# Altium PCB XLIN1.7-2048SQ TE0_MB.PcbDoc
Units mm, origin at the board's own origin, x right, y up, seen from the top; angles counter-clockwise.
Board outline 150 x 150 mm, 2 copper layers (Top Layer, Bottom Layer); 42 components, 60 nets, 288 pads, 0 vias.
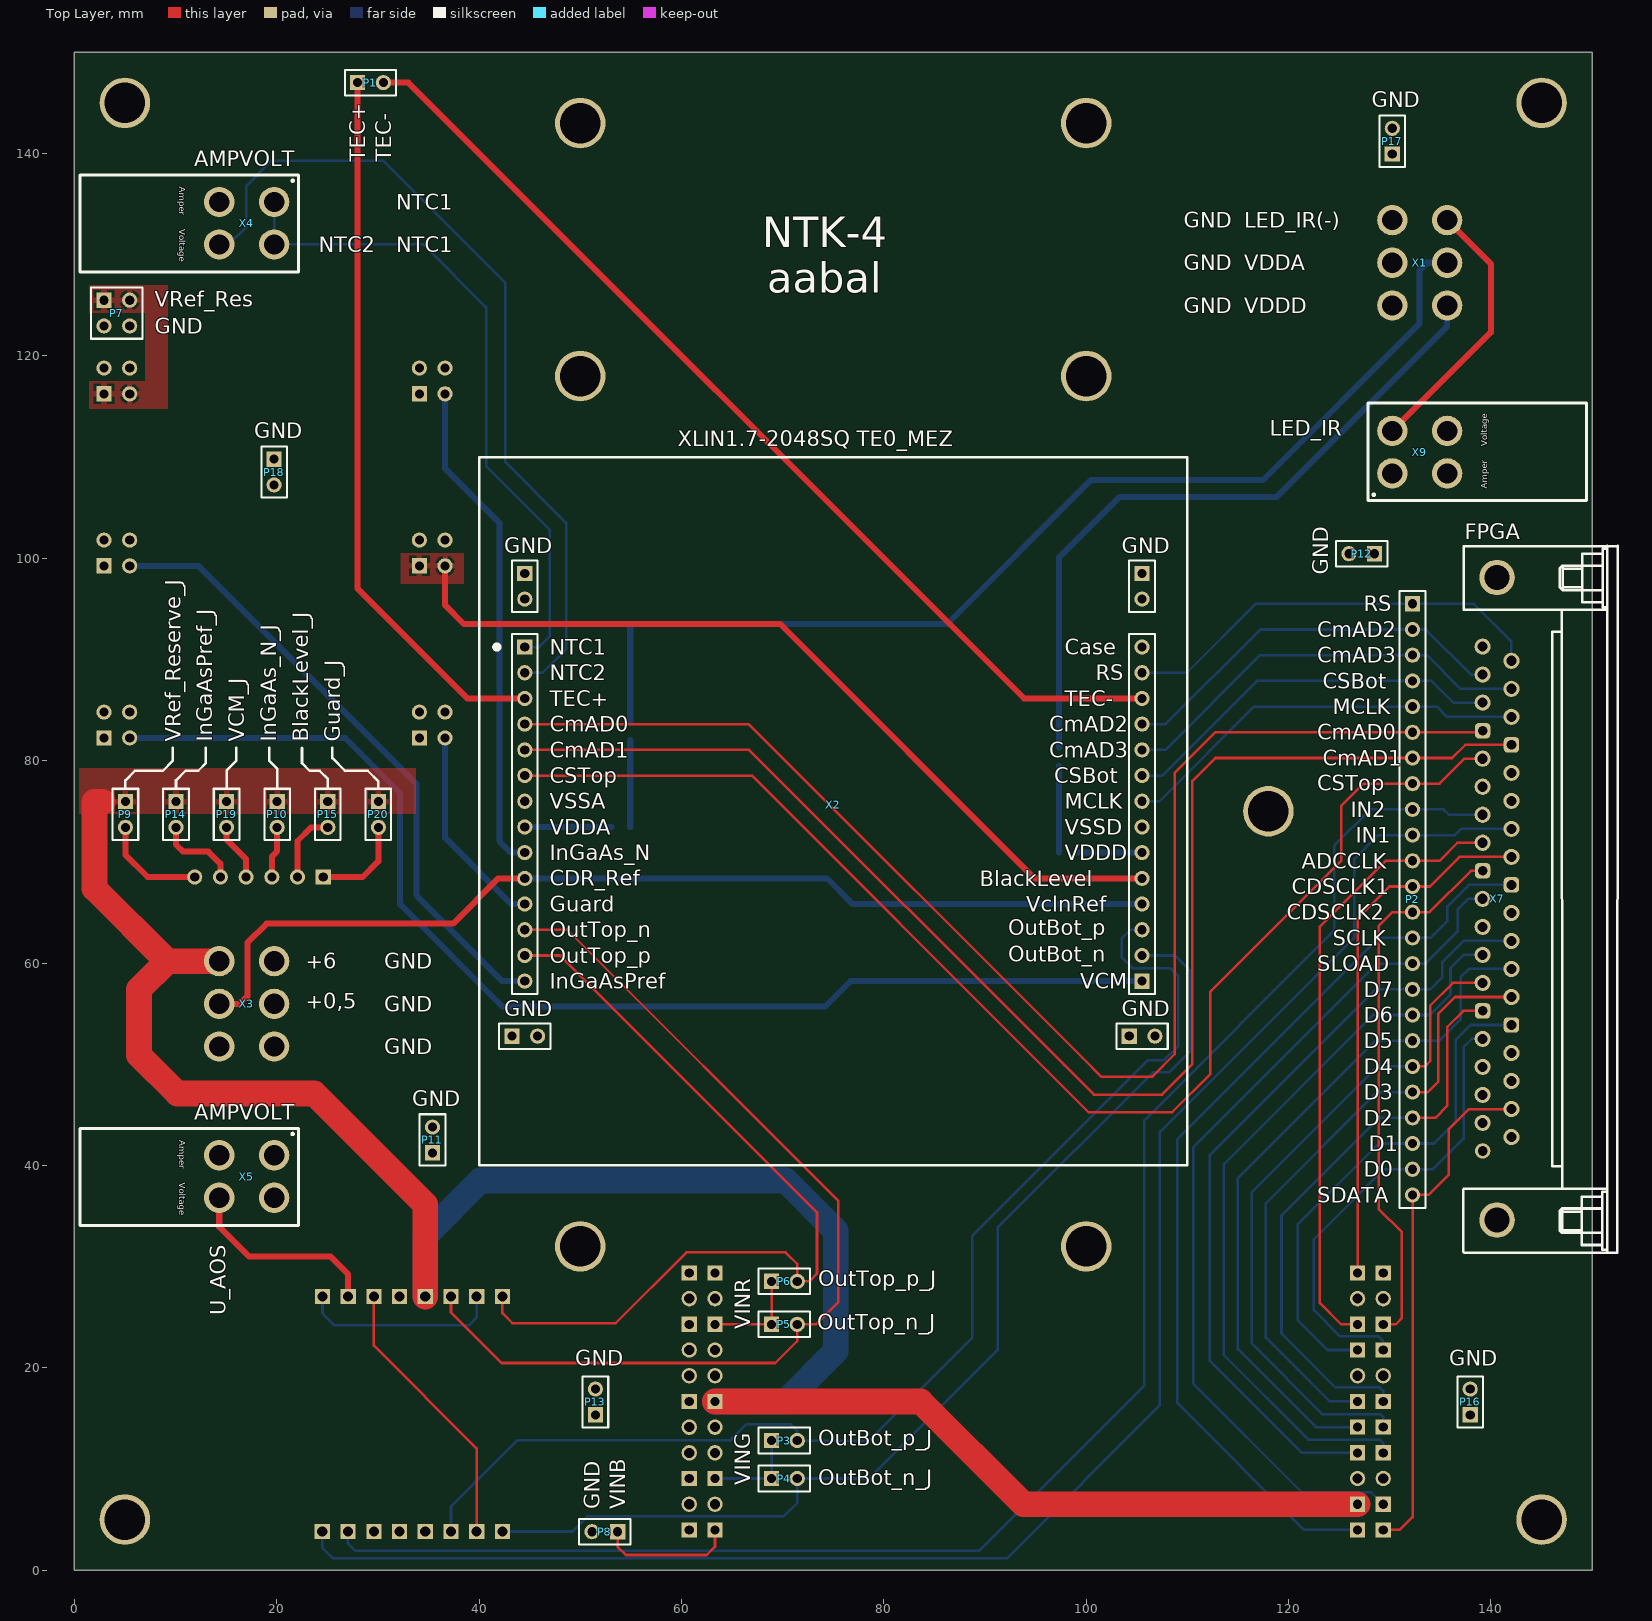
[diagram p0: Top Layer view]
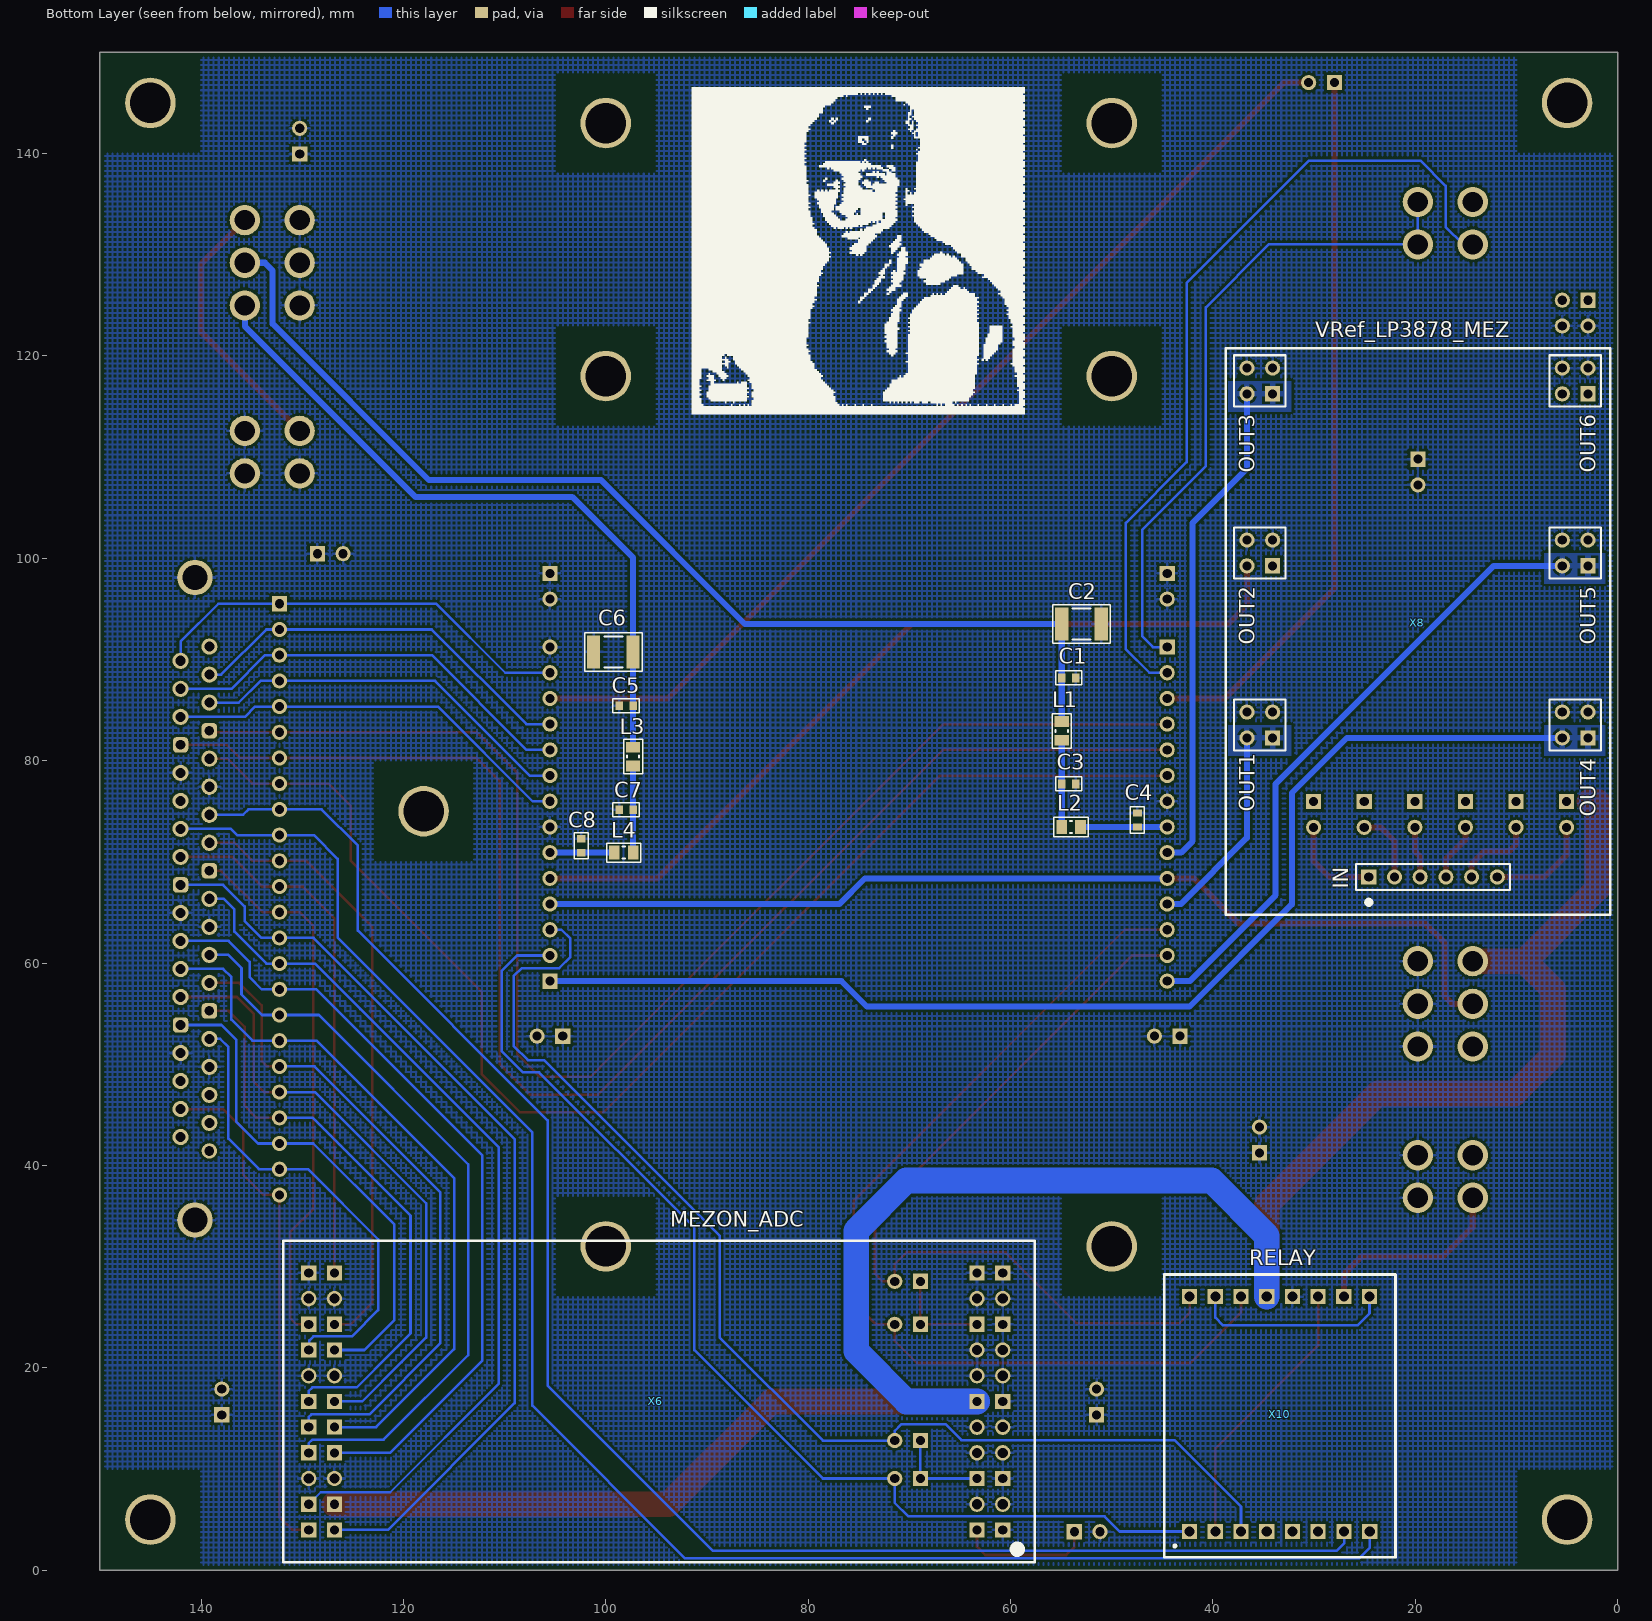
[diagram p1: Bottom Layer view, seen from below]

## Layer stack, top to bottom
Top Solder: solder mask 0.0102, Solder Resist, Dk 3.5
Top Layer: signal copper 0.0356
Dielectric 1: dielectric 0.32, FR-4, Dk 4.8
Bottom Layer: signal copper 0.0356
Bottom Solder: solder mask 0.0102, Solder Resist, Dk 3.5

## Board outline
0,0 0,150 150,150 150,0

## Design rules (kind name [scope] priority, off if disabled: settings)
Clearance [All] p1: gap=0.254 ignorepadtopadclearanceinfootprint=FALSE except(0: Arc-Hole Track-Hole SMDPad-Hole THPad-Hole Via-Hole Fill-Hole Poly-Hole Region-Hole Text-Hole)
PolygonConnect [All] p1: connectstyle=Relief reliefconductorwidth=0.254 reliefentries=4 polygonreliefangle="90 Angle" airgapwidth=0.254
RoutingVias [All] p1: holewidth=0.711 width=1.27 viastyle="Through Hole" minholewidth=0.711 minwidth=1.27 maxholewidth=0.711 maxwidth=1.27
SolderMaskExpansion [All] p1: expansion=0.102
Width [All] p1: maxlimit=10 minlimit=0.254 preferedwidth=0.254
30 further rules are at their usual default settings.

## Components (designator, comment, footprint, x,y, rotation, side; value= is the part's Value field where it differs from the comment)
C1 "0,1uF" CAP_0603 54.25,88.175 r0 bottom
C2 "10uF" CAP_1812 52.99,93.5 r0 bottom
C3 "0,1uF" CAP_0603 54.25,77.7 r0 bottom
C4 "0,1uF" CAP_0603 47.475,74.135 r270 bottom
C5 "0,1uF" CAP_0603 97.99,85.425 r180 bottom
C6 "10uF" CAP_1812 99.25,90.75 r180 bottom
C7 "0,1uF" CAP_0603 97.99,75.15 r180 bottom
C8 "0,1uF" CAP_0603 102.425,71.595 r270 bottom
L1 "4,7uH" IND_0805 54.94,82.94 r270 bottom
L2 "4,7uH" IND_0805 54.015,73.445 r180 bottom
L3 "4,7uH" IND_0805 97.3,80.4 r270 bottom
L4 "4,7uH" IND_0805 98.225,70.905 r0 bottom
P1 "TEC" HDR1X2 28,147 r0 top
P2 "Header 24" HDR1X24 132.25,95.5 r270 top
P3 "OutBot_p_J" HDR1X2 68.905,12.805 r0 top
P4 "OutBot_n_J" HDR1X2 68.905,9.055 r0 top
P5 "OutTop_n_J" HDR1X2 68.905,24.295 r0 top
P6 "OutTop_p_J" HDR1X2 68.905,28.543 r0 top
P7 "VRef_Reserve" HDR2X2 2.936,125.5 r270 top
P8 "VINB" HDR1X2 53.7,3.8 r180 top
P9 "VRef_Reserve_J" HDR1X2 5.051,75.95 r270 top
P10 "InGaAs_N_J" HDR1X2 20.051,75.95 r270 top
P11 "GND" HDR1X2 35.399,41.243 r90 top
P12 "GND" HDR1X2 128.5,100.449 r180 top
P13 "GND" HDR1X2 51.499,15.35 r90 top
P14 "InGaAsPref_J" HDR1X2 10.051,75.95 r270 top
P15 "BlackLevel_J" HDR1X2 25.051,75.95 r270 top
P16 "GND" HDR1X2 137.949,15.35 r90 top
P17 "GND" HDR1X2 130.249,139.95 r90 top
P18 "GND" HDR1X2 19.749,109.79 r270 top
P19 "VCM_J" HDR1X2 15.051,75.95 r270 top
P20 "Guard_J" HDR1X2 30.051,75.95 r270 top
X1 "POWER" POWER 130.25,133.418 r270 top
X2 "XLIN1.7-2048SQ TE0_MEZ" "XLIN1.7-2048SQ TE0_MEZ" 75,75 r0 top
X3 "POWER" POWER 19.75,51.75 r90 top
X4 "AMPVOLT" AMP_VOLTMETER 19.75,135.211 r270 top
X5 "AMPVOLT" AMP_VOLTMETER 19.75,41 r270 top
X6 "MEZON_ADC" MEZON_ADC 60.776,3.975 r0 bottom locked
X7 "CHEAP_CON_37_FEMALE" CHEAP_CONN_FEMALE 140.601,98.096 r270 top locked
X8 "VRef_LP3878_MEZ" VRef_LP3878_MEZ 0.749,64.75 r90 bottom locked
X9 "LED_IR" AMP_VOLTMETER 130.25,108.385 r90 top locked
X10 "RELAY" RELAY_MODULE 24.5,3.82 r90 bottom

## Footprints (in the part's own frame and the unit in brackets; to place one, negate y for a bottom-side part, rotate by r counter-clockwise, add the part's x,y. Pads: shape width x height; smd on the part's side, far side on the other; paste and mask are expansions set on the pad)
AMP_VOLTMETER [mm] "AMP_VOLTMETER"
  round 3 hole 2: 1(0,0) 2(0,-5.423) 3(4.2,-5.423) 4(4.2,0)
  silkscreen extent -2.66,-19.17 6.94,2.42
CAP_0603 [mm]
  rect 0.72x0.88 smd: 1(-0.69,0) 2(0.69,0)
  silkscreen extent -1.3,-0.7 1.3,0.7, body extent -0.8,-0.4 0.8,0.4, height 0.9
CAP_1812 [mm]
  rect 1.3x3.25 smd: 1(-1.95,0) 2(1.95,0)
  silkscreen extent -2.85,-1.9 2.85,1.9, body extent -2.25,-1.6 2.25,1.6, height 2
CHEAP_CONN_FEMALE [mm] "CHEAP_CONN_FEMALE"
  round 1.6 hole 1: 1(6.833,-1.422) 2(9.601,-1.422) 3(12.37,-1.422) 5(17.907,-1.422) 6(20.676,-1.422) 7(23.444,-1.422) 8(26.213,-1.422) 10(31.75,-1.422) 11(34.519,-1.422) 12(37.287,-1.422) 13(40.056,-1.422) 15(45.593,-1.422) 16(48.362,-1.422) 17(51.13,-1.422) 18(53.899,-1.422) 20(8.23,1.422) 21(10.998,1.422) 22(13.767,1.422) 24(19.304,1.422) 25(22.073,1.422) 26(24.841,1.422) 27(27.61,1.422) 29(33.147,1.422) 30(35.916,1.422) 31(38.684,1.422) 32(41.453,1.422) 34(46.99,1.422) 35(49.759,1.422) 36(52.527,1.422) 37(55.296,1.422)
  rrect50% 1.524x1.524 hole 0.965: 4(15.138,-1.422) 9(28.981,-1.422) 14(42.824,-1.422) 23(16.535,1.422) 28(30.378,1.422) 33(44.221,1.422)
  round 1.524 hole 0.965: 19(56.667,-1.422)
  round 3.5 hole 2.5: 38(0,0) 39(63.5,0)
  silkscreen extent -3.11,-3.36 66.72,11.92
HDR1X2 [mm] "Connector; Header; 2 Position"
  rect 1.5x1.5 hole 0.9: 1(0,0)
  round 1.5 hole 0.9: 2(2.54,0)
  silkscreen extent -1.27,-1.27 3.81,1.27
HDR1X24 [mm] "Connector; Header; 24 Position"
  rect 1.5x1.5 hole 0.9: 1(0,0)
  round 1.5 hole 0.9: 2(2.54,0) 3(5.08,0) 4(7.62,0) 5(10.16,0) 6(12.7,0) 7(15.24,0) 8(17.78,0) 9(20.32,0) 10(22.86,0) 11(25.4,0) 12(27.94,0) 13(30.48,0) 14(33.02,0) 15(35.56,0) 16(38.1,0) 17(40.64,0) 18(43.18,0) 19(45.72,0) 20(48.26,0) 21(50.8,0) 22(53.34,0) 23(55.88,0) 24(58.42,0)
  silkscreen extent -1.27,-1.27 59.69,1.27
HDR2X2 [mm] "Connector; Header; 2x2 Position"
  rect 1.5x1.5 hole 0.9: 1(0,0)
  round 1.5 hole 0.9: 2(0,2.54) 3(2.54,0) 4(2.54,2.54)
  silkscreen extent -1.27,-1.27 3.81,3.81
IND_0805 [mm]
  rect 1.05x1.4 smd: 1(-0.925,0) 2(0.925,0)
  silkscreen extent -1.7,-0.95 1.7,0.95, body extent -1.1,-0.7 1.1,0.7, height 1
MEZON_ADC [mm] "MEZON_ADC"
  rect 1.5x1.5 hole 0.9: 1(0,0) 2(2.54,0) 5(0,-5.08) 6(2.54,-5.08) 11(0,-12.7) 12(2.54,-12.7) 17(0,-20.32) 18(2.54,-20.32) 21(0,-25.4) 22(2.54,-25.4) 23(66.04,-25.4) 24(68.58,-25.4) 27(66.04,-20.32) 28(68.58,-20.32) 29(66.04,-17.78) 30(68.58,-17.78) 33(66.04,-12.7) 34(68.58,-12.7) 35(66.04,-10.16) 36(68.58,-10.16) 37(66.04,-7.62) 38(68.58,-7.62) 41(66.04,-2.54) 42(68.58,-2.54) 43(66.04,0) 44(68.58,0)
  round 1.524 hole 1: 3(0,-2.54) 4(2.54,-2.54) 7(0,-7.62) 8(2.54,-7.62) 9(0,-10.16) 10(2.54,-10.16) 13(0,-15.24) 14(2.54,-15.24) 15(0,-17.78) 16(2.54,-17.78) 19(0,-22.86) 20(2.54,-22.86) 25(66.04,-22.86) 26(68.58,-22.86) 31(66.04,-15.24) 32(68.58,-15.24) 39(66.04,-5.08) 40(68.58,-5.08)
  silkscreen extent -3.17,-28.57 71.12,3.17
POWER [mm] "POWER"
  round 3 hole 2: 1(8.435,5.422) 2(4.217,5.422) 3(0,5.422) 4(8.435,0) 5(4.217,0) 6(0,0)
RELAY_MODULE [mm]
  rect 1.5x1.5 hole 1: 1(0,17.805) 2(0,15.265) 3(0,12.725) 4(0,10.185) 5(0,7.645) 6(0,5.105) 7(0,2.54) 8(0,0) 9(23.216,0.025) 10(23.216,2.565) 11(23.216,5.105) 12(23.216,7.645) 13(23.216,10.185) 14(23.216,12.725) 15(23.216,15.265) 16(23.216,17.805)
  silkscreen extent -2.54,-2.54 25.4,20.32
VRef_LP3878_MEZ [mm]
  rect 1.5x1.5 hole 0.9: 1(3.75,23.85) 7(17.5,33.35) 8(34.5,33.35) 9(51.5,33.35) 10(17.5,2.187) 11(34.5,2.187) 12(51.5,2.187)
  round 1.5 hole 0.9: 2(3.75,21.31) 3(3.75,18.77) 4(3.75,16.23) 5(3.75,13.69) 6(3.75,11.15) 7(17.5,35.89) 8(34.5,35.89) 9(51.5,35.89) 10(17.5,4.727) 11(34.5,4.727) 12(51.5,4.727) 13(20.04,2.187) 13(20.04,4.727) 13(20.04,33.35) 13(20.04,35.89) 13(37.04,2.187) 13(37.04,4.727) 13(37.04,33.35) 13(37.04,35.89) 13(54.04,2.187) 13(54.04,4.727) 13(54.04,33.35) 13(54.04,35.89)
  silkscreen extent 0,0 56,38, body extent 0,0 56,38, height 12.5
"XLIN1.7-2048SQ TE0_MEZ" [mm]
  rect 1.5x1.5 hole 0.9: 1(-30.48,16.225) 15(30.52,-16.795) 29(-31.75,-22.23) 29(-30.48,23.5) 29(29.25,-22.23) 29(30.52,23.5)
  round 1.5 hole 0.9: 2(-30.48,13.685) 3(-30.48,11.145) 4(-30.48,8.605) 5(-30.48,6.065) 6(-30.48,3.525) 7(-30.48,0.985) 8(-30.48,-1.555) 9(-30.48,-4.095) 10(-30.48,-6.635) 11(-30.48,-9.175) 12(-30.48,-11.715) 13(-30.48,-14.255) 14(-30.48,-16.795) 16(30.52,-14.255) 17(30.52,-11.715) 18(30.52,-9.175) 19(30.52,-6.635) 20(30.52,-4.095) 21(30.52,-1.555) 22(30.52,0.985) 23(30.52,3.525) 24(30.52,6.065) 25(30.52,8.605) 26(30.52,11.145) 27(30.52,13.685) 28(30.52,16.225) 29(-30.48,20.96) 29(-29.21,-22.23) 29(30.52,20.96) 29(31.79,-22.23)
  silkscreen extent -35,-35 35,35, body extent -35,-35 35,35, height 12.5

## Part data
C1 C2 C3 C4 C5 C6 C7 C8: library part CAP
L1 L2 L3 L4: library part IND
P1 P3 P4 P5 P6 P8 P9 P10 P11 P12 P13 P14 P15 P16 P17 P18 P19 P20: library part "Header 2", "Header, 2-Pin", LatestRevisionDate=17-Jul-2002, LatestRevisionNote="Re-released for DXP Platform.", Publisher="Altium Limited"
P2: "Header, 24-Pin", LatestRevisionDate=17-Jul-2002, LatestRevisionNote="Re-released for DXP Platform.", Publisher="Altium Limited"
P7: library part "Header 2X2", "Header, 2-Pin, Dual row", LatestRevisionDate=17-Jul-2002, LatestRevisionNote="Re-released for DXP Platform.", Publisher="Altium Limited"
X4 X5 X9: library part AMP_VOLTMETER
X10: library part MEZON_RELAY

## Free pads (board coordinates)
  round 5 hole 4 unplated: 0(5,145) 0(5,5) 0(50,32) 0(50,118) 0(50,143) 0(100,32) 0(100,118) 0(100,143) 0(118,75) 0(145,145) 0(145,5)

## Nets (pads, with @x,y where several pads share a name; then routed paths per layer and width w, separated by ;. In a path a pad name is that pad's centre, name@x,y a point inside that pad or via, vN(x,y) a via of type N, cw(c..) or ccw(c..) an arc to the next point about the centre after c; other vN are vias at no path point)
+0,5: X2.10 X2.18 X3.2 | length 100.5
  Top Layer w0.6: X3.2 16.368,55.968 17.1,56.7 17.1,62 19,63.9 37.435,63.9 41.9,68.365 X2.10
  Bottom Layer w0.6: X2.10 74.385,68.365 76.925,65.825 X2.18
+6: P9.1 P10.1 P14.1 P15.1 P19.1 P20.1 X3.1 X6.12 X6.41 X10.13 | length 223.1
  Top Layer w2.54: 2.8,75.95 2,75.95 2,67.37 9.185,60.185 ; X3.1 9.185,60.185 ; X10.13 34.685,36.13 23.715,47.1 10.2,47.1 6.4,50.9 6.4,57.4 9.185,60.185 ; X6.12 83.629,16.675 93.805,6.5 93.82,6.515 X6.41
  Bottom Layer w2.54: X10.13 34.685,33.06 40.126,38.5 70.3,38.5 75.25,33.55 75.25,21.65 70.275,16.675 X6.12
ADCCLK: P2.11 X6.27 X7.8 | length 61.3
  Top Layer w0.254: X6.27 125.205,24.295 123.1,26.4 123.1,63.6 129.6,70.1 P2.11 134.9,70.1 136.683,71.883 X7.8
BlackLevel: X2.19 X8.8 | length 84
  Top Layer w0.6: X8.8@36.639,99.25 36.639,95.361 38.5,93.5 69.75,93.5 94.885,68.365 X2.19
CDSCLK1: P2.12 X6.23 X7.27 | length 52.8
  Top Layer w0.254: X6.23 126.816,64.416 129.96,67.56 P2.12 133.96,67.56 136.886,70.486 X7.27
CDSCLK2: P2.13 X6.28 X7.9 | length 54.3
  Top Layer w0.254: X6.28 129.361,24.3 130.6,24.3 131.2,24.9 131.2,33.4 128.9,35.7 128.9,63.641 130.28,65.02 P2.13 133.92,65.02 138.014,69.114 X7.9
CmAD0: P2.6 X2.4 X7.4 | length 139.3
  Top Layer w0.254: X2.4 66.645,83.605 99.609,50.641 101.5,48.75 106.5,48.75 108.732,50.982 108.732,78.8 112.733,82.8 P2.6 X7.4@139.021,82.8
CmAD1: P2.7 X2.5 X7.23 | length 142.3
  Top Layer w0.254: X2.5 66.685,81.065 97.841,49.909 100.75,47 107.5,47 110.5,50 110.5,78 112.76,80.26 P2.7 136.16,80.26 137.46,81.56 X7.23
CmAD2: P2.2 X2.25 X7.2 | length 39.4
  Bottom Layer w0.254: X2.25 107.855,83.605 117.21,92.96 P2.2 133.54,92.96 138.005,88.495 X7.2
CmAD3: P2.3 X2.24 X7.21 | length 41.8
  Bottom Layer w0.254: X2.24 107.815,81.065 117.17,90.42 P2.3 133.68,90.42 137.002,87.098 X7.21
CSBot: P2.4 X2.23 X7.3 | length 38.4
  Bottom Layer w0.254: X2.23 107.525,78.525 116.88,87.88 P2.4 134.12,87.88 136.274,85.726 X7.3
CSTop: P2.8 X2.6 X7.5 | length 130.9
  Top Layer w0.254: X2.6 66.975,78.525 96.25,49.25 100.25,45.25 108.5,45.25 112.268,49.018 112.268,57.168 125.2,70.1 125.2,75.5 127.42,77.72 P2.8 134.92,77.72 137.389,80.189 X7.5
D0: P2.23 X6.30 X7.15 | length 46.2
  Bottom Layer w0.254: X6.30 129.3,21.811 129.3,22.7 128.9,23.1 125.1,23.1 122.5,25.7 122.5,32.7 129.42,39.62 P2.23 134.28,39.62 137.3,42.641 137.3,51.7 138.103,52.503 X7.15
D1: P2.22 X6.29 X7.33 | length 50.6
  Bottom Layer w0.254: X6.29 123.845,21.755 120.9,24.7 120.9,34.15 128.91,42.16 P2.22 134.36,42.16 136.5,44.3 136.5,52.4 137.974,53.874 X7.33
D2: P2.21 X6.34 X7.14 | length 57.9
  Top Layer w0.254: P2.21 134.5,44.7 135.7,45.9 135.7,53.7 137.271,55.271 X7.14
  Bottom Layer w0.254: X6.34 129.356,17.716 129,18.072 124.612,18.072 121.142,21.542 119.3,23.385 119.3,35.05 128.95,44.7 P2.21
D3: P2.20 X6.33 X7.32 | length 61.6
  Top Layer w0.254: P2.20 133.76,47.24 134.8,48.281 134.8,55 136.443,56.643 X7.32
  Bottom Layer w0.254: X6.33 124.07,16.675 120.172,20.572 117.76,22.985 117.76,36.26 128.74,47.24 P2.20
D4: P2.19 X6.36 X7.13 | length 66.6
  Top Layer w0.254: P2.19 133.48,49.78 134,50.3 134,55.8 136.24,58.04 X7.13
  Bottom Layer w0.254: X6.36 129.356,15.144 129.1,15.4 123.369,15.4 116.363,22.406 116.363,37.363 128.78,49.78 P2.19
D5: P2.18 X6.35 X7.31 | length 70
  Bottom Layer w0.254: X6.35 122.694,14.135 114.991,21.838 114.991,38.741 128.57,52.32 P2.18 134.92,52.32 137,54.4 137,58.6 137.812,59.412 X7.31
D6: P2.17 X6.38 X7.12 | length 74.8
  Bottom Layer w0.254: X6.38 129.356,12.544 129,12.9 121.954,12.9 113.594,21.26 113.594,40.094 128.36,54.86 P2.17 133.96,54.86 136,56.9 136,59.5 137.309,60.809 X7.12
D7: P2.16 X6.37 X7.30 | length 78.1
  Bottom Layer w0.254: X6.37 121.319,11.595 112.223,20.691 112.223,41.023 128.6,57.4 P2.16 134,57.4 135.2,58.6 135.2,60.1 137.28,62.18 X7.30
GND: C1.1 C2.1 C3.1 C4.1 C5.1 C6.1 C7.1 C8.1 P7.3 P7.4 P8.2 P11.1 P11.2 P12.1 P12.2 P13.1 P13.2 P16.1 P16.2 P17.1 P17.2 P18.1 P18.2 X1.4 X1.5 X1.6 X2.7 X2.21 X2.28 X2.29 X3.4 X3.5 X3.6 X5.1 X5.4 X6.1 X6.3 X6.4 X6.5 X6.7 X6.8 X6.9 X6.10 X6.11 X6.13 X6.14 X6.15 X6.16 X6.17 X6.19 X6.20 X6.21 X6.22 X6.24 X6.25 X6.26 X6.31 X6.32 X6.39 X6.40 X7.6 X7.11 X7.16 X7.24 X7.29 X7.34 X7.38 X7.39 X8.13 X9.1 X9.2 X9.3 X10.12
Guard: X2.11 X8.7 | length 20.5
  Bottom Layer w0.6: X8.7@36.639,82.25 36.639,72.361 43.175,65.825 X2.11
IN1: P2.10 X7.26 X10.8 | length 169.8
  Bottom Layer w0.254: X10.8 24.5,2.25 25.581,1.169 92.169,1.169 107.25,16.25 107.25,43.25 126.5,62.5 126.5,70.3 128.84,72.64 P2.10 136.44,72.64 137.055,73.255 X7.26
IN2: P2.9 X7.7 X10.7 | length 164.5
  Bottom Layer w0.254: X10.7 27.04,2.653 27.788,1.905 89.405,1.905 105.75,18.25 105.75,44.45 124.5,63.2 124.5,71.6 128.08,75.18 P2.9 135.32,75.18 135.848,74.652 X7.7
InGaAs_N: X2.9 X8.9 | length 49.4
  Bottom Layer w0.6: X8.9@36.639,116.25 36.639,108.861 42,103.5 42,72.05 43.145,70.905 X2.9
InGaAsPref: X2.14 X8.11 | length 62.5
  Bottom Layer w0.6: X8.11@5.476,99.25 12.25,99.25 33.8,77.7 33.8,66.7 42.295,58.205 X2.14
"LED IR -": X1.3 X9.4 | length 26.7
  Top Layer w0.6: X9.4 140,122.335 140,129.09 X1.3
MCLK: P2.5 X2.22 X7.22 | length 40.8
  Bottom Layer w0.254: X2.22 107.235,75.985 116.59,85.34 P2.5 134.66,85.34 135.671,84.329 X7.22
NetC3_2: C3.2 L1.2 L2.1 | length 8.6
  Bottom Layer w0.6: L2.1 C3.2 L1.2
NetC7_2: C7.2 L3.2 L4.1 | length 8.6
  Bottom Layer w0.6: L4.1 C7.2 L3.2
NetX10_2: X10.2 X10.11 | length 27.4
  Top Layer w0.254: X10.11 29.605,22.195 39.765,12.035 X10.2
NetX10_9: X10.9 X10.15 | length 19.8
  Bottom Layer w0.254: X10.9 24.525,25.375 25.7,24.2 39,24.2 39.765,24.965 X10.15
NTC1: X2.1 X4.1 X4.4 | length 65.8
  Bottom Layer w0.254: X4.1 X4.4 34.489,131.011 40.7,124.8 40.7,109.1 47,102.8 47,92.3 45.925,91.225 X2.1
NTC2: X2.2 X4.3 | length 82.8
  Bottom Layer w0.254: X4.3 15.261,131.011 17,132.75 17,136.8 19.5,139.3 30.5,139.3 42.6,127.2 42.6,109.5 48.6,103.5 48.6,91 46.285,88.685 X2.2
OutBot_n: P4.2 X2.16 X10.1 | length 109.5
  Bottom Layer w0.254: X10.1 49.22,3.82 50.709,5.309 70.109,5.309 71.445,6.645 P4.2 78.555,9.055 91.25,21.75 91.25,33.85 106.6,49.2 108.2,49.2 110.302,51.302 110.302,59.198 108.755,60.745 X2.16
OutBot_p: P3.2 X2.17 X10.3 | length 118.4
  Bottom Layer w0.254: X10.3 37.225,6.275 43.803,12.852 64.852,12.852 66.402,14.402 70.815,14.402 71.445,13.772 P3.2 78.555,12.805 88.75,23 88.75,33.05 106.102,50.402 107.702,50.402 109.1,51.8 109.1,58.7 108.3,59.5 104.6,59.5 103.5,60.6 103.5,62.4 104.385,63.285 X2.17
OutTop_n: P5.2 X2.12 X10.14 | length 97.4
  Top Layer w0.254: X10.14 37.225,25.475 42.228,20.472 69.272,20.472 71.445,22.645 P5.2 73.295,24.295 75.5,26.5 75.5,36.5 48.715,63.285 X2.12
OutTop_p: P6.2 X2.13 X10.16 | length 84
  Top Layer w0.254: X10.16 42.305,25.395 43.3,24.4 53.5,24.4 60.5,31.4 70.3,31.4 71.445,30.255 P6.2 72.643,28.543 73.4,29.3 73.4,35.35 48.005,60.745 X2.13
RS: P2.1 X2.27 X7.20 | length 42.8
  Bottom Layer w0.254: X2.27 109.935,88.685 116.75,95.5 125.75,95.5 ; 125.75,95.5 P2.1 138.3,95.5 142.023,91.777 X7.20
SCLK: P2.14 X6.43 X7.28 | length 93.4
  Bottom Layer w0.254: X6.43 121.525,3.975 109,16.5 109,42.6 124.2,57.8 128.88,62.48 P2.14 134.02,62.48 135.7,64.161 135.7,65.6 137.817,67.717 X7.28
SDATA: P2.24 X6.44 X7.36 | length 51.2
  Top Layer w0.254: X6.44 130.975,3.975 132.25,5.25 P2.24 133.82,37.08 135.839,39.1 135.839,43.589 137.819,45.569 X7.36
SLOAD: P2.15 X6.42 X7.10 | length 87.1
  Bottom Layer w0.254: X6.42 128.171,7.7 121.3,7.7 110.6,18.4 110.6,41.8 124.25,55.45 128.74,59.94 P2.15 133.54,59.94 136.7,63.1 136.7,65.3 137.746,66.346 X7.10
TEC+: P1.1 X2.3 | length 71
  Top Layer w0.6: P1.1 28,97 38.855,86.145 X2.3
TEC-: P1.2 X2.26 | length 100.2
  Top Layer w0.6: P1.2 33,147 93.855,86.145 X2.26
U_AOS: X5.3 X10.10 | length 19.8
  Top Layer w0.6: X5.3 14.327,33.923 17.25,31 25.315,31 27.065,29.25 X10.10
VCM: X2.15 X8.10 | length 118.5
  Bottom Layer w0.6: X8.10@5.476,82.25 26.75,82.25 32.2,76.8 32.2,65.8 42.3,55.7 74.2,55.7 76.705,58.205 X2.15
VDDA: C1.2 C2.2 L1.1 X1.2 | length 108.2
  Bottom Layer w0.6: L1.1 C1.2 C2.2 86.25,93.5 100.471,107.721 117.471,107.721 132.918,123.168 132.918,128.418 133.7,129.2 X1.2
VDDA_STAB: C4.2 L2.2 X2.8 | length 8.6
  Bottom Layer w0.6: X2.8 C4.2 L2.2
VDDD: C5.2 C6.2 L3.1 X1.1 | length 68.6
  Bottom Layer w0.6: L3.1 C5.2 C6.2 97.3,100.05 103.32,106.07 118.82,106.07 135.672,122.922 X1.1
VDDD_STAB: C8.2 L4.2 X2.20 | length 6.4
  Bottom Layer w0.6: L4.2 C8.2 X2.20
VINB: P8.1 X6.2 | length 13.4
  Top Layer w0.254: P8.1 53.7,2.3 54.5,1.5 62.5,1.5 63.316,2.316 X6.2
VING: P3.1 P4.1 X6.6 | length 9.3
  Bottom Layer w0.254: X6.6 P4.1 P3.1
VINR: P5.1 P6.1 X6.18 | length 9.8
  Top Layer w0.254: X6.18 P5.1 P6.1
VRef_IN1: P20.2 X8.1 | length 9.5
  Top Layer w0.6: X8.1 28.5,68.5 30.051,70.051 P20.2
VRef_IN2: P15.2 X8.2 | length 7.1
  Top Layer w0.6: X8.2 22.059,72.059 23.41,73.41 P15.2
VRef_IN3: P10.2 X8.3 | length 5.1
  Top Layer w0.6: X8.3 19.519,70.519 20.051,71.051 P10.2
VRef_IN4: P19.2 X8.4 | length 5.7
  Top Layer w0.6: P19.2 15.051,72.199 16.979,70.271 X8.4
VRef_IN5: P14.2 X8.5 | length 8.2
  Top Layer w0.6: P14.2 10.051,71.699 10.75,71 13.25,71 14.439,69.811 X8.5
VRef_IN6: P9.2 X8.6 | length 10.5
  Top Layer w0.6: P9.2 5.051,70.699 7.25,68.5 X8.6
VRef_Reserve: P7.1 P7.2 X8.12
pads on no net: X3.3 X4.2 X5.2 X7.1 X7.17 X7.18 X7.19 X7.25 X7.35 X7.37 X10.4 X10.5 X10.6

## Polygon pours and split planes (outlines as drawn)
GND on Bottom Layer "GND_L02_P102" (hatched 90Degree grid 0.5 track 0.2, remove dead copper, pour order 102): 0.5,0.5 0.5,149.5 149.5,149.5 149.5,0.5
GND on Bottom Layer "GND_L02_P086" (hatched 90Degree grid 0.5 track 0.2, remove dead copper, pour order 86): 153,147
InGaAsPref on Bottom Layer "INGAASPREF_L02_P054" (solid, remove dead copper, pour order 54): 7.25,100.5 7.25,97.5 1.25,97.5 1.25,100.5
Guard on Bottom Layer "GUARD_L02_P068" (solid, remove dead copper, pour order 68): 38.5,83.5 38.5,80.5 32.25,80.5 32.25,83.5
InGaAs_N on Bottom Layer "INGAAS_N_L02_P066" (solid, remove dead copper, pour order 66): 38.5,117.5 38.5,114.5 32.25,114.5 32.25,117.5
VCM on Bottom Layer "VCM_L02_P056" (solid, remove dead copper, pour order 56): 7.25,83.5 7.25,80.5 1.25,80.5 1.25,83.5
GND on Bottom Layer "GND_L02_P000" (hatched 90Degree grid 0.5 track 0.2, remove dead copper, pour order 0): 0,149.5
+6 on Top Layer "+6_L01_P094" (solid, remove dead copper, pour order 94): 0.5,74.75 0.5,79.25 33.75,79.25 33.75,74.75
VRef_Reserve on Top Layer "VREF_RESERVE_L01_P090" (solid, remove dead copper, pour order 90): 1.5,127 1.5,124.25 7,124.25 7,117.5 1.5,117.5 1.5,114.75 9.25,114.75 9.25,127
BlackLevel on Top Layer "BLACKLEVEL_L01_P064" (solid, remove dead copper, pour order 64): 38.5,100.5 32.25,100.5 32.25,97.5 38.5,97.5
no net on Top Layer "NONET_L01_P062" (hatched 90Degree grid 0.5 track 0.2, remove dead copper, pour order 62): 35.4,89.8
no net on Top Layer "NONET_L01_P060" (hatched 90Degree grid 0.5 track 0.2, remove dead copper, pour order 60): 35.4,89.8
no net on Top Layer "NONET_L01_P050" (hatched 90Degree grid 0.5 track 0.2, remove dead copper, pour order 50): 7.25,106.75
no net on Top Layer "NONET_L01_P048" (hatched 90Degree grid 0.5 track 0.2, remove dead copper, pour order 48): 1.25,107
no net on Top Layer "NONET_L01_P046" (hatched 90Degree grid 0.5 track 0.2, remove dead copper, pour order 46): 1.25,107
no net on Top Layer "NONET_L01_P044" (hatched 90Degree grid 0.5 track 0.2, remove dead copper, pour order 44): 1.25,107
no net on Top Layer "NONET_L01_P042" (hatched 90Degree grid 0.5 track 0.2, remove dead copper, pour order 42): 1.25,107
OutBot_n on Top Layer "OUTBOT_N_L01_P022" (hatched 90Degree grid 0.5 track 0.2, remove dead copper, pour order 22): 32.5,106.5

## Other copper
Bottom Layer:
  pour cut-out: 55,148 55,138 45,138 45,148
  pour cut-out: 105,148 105,138 95,138 95,148
  pour cut-out: 123,80 123,70 113,70 113,80
  pour cut-out: 55,37 55,27 45,27 45,37
  pour cut-out: 105,37 105,27 95,27 95,37
  pour cut-out: 105,123 105,113 95,113 95,123
  pour cut-out: 58,116
  pour cut-out: 55,123 55,113 45,113 45,123
  pour cut-out: 0,150 10,150 10,140 0,140
  pour cut-out: 140,150 150,150 150,140 140,140
  pour cut-out: 140,10 150,10 150,0 140,0
  pour cut-out: 0,10 10,10 10,0 0,0

## Silkscreen, mask and mechanical layers (free items; w line width, h text height)
Top Overlay:
  lines w0.254: 5.051,77.22 5.051,78.051 6,79 8.75,79 9.75,80 9.75,81.25 ; 10.051,77.22 10.051,78.051 11,79 12.25,79 13,79.75 13,81.25 ; 15.051,77.22 15.051,79.033 16,79.983 16,81.25 ; 19.25,81.25 19.25,80 20.051,79.199 20.051,77.22 ; 22.5,81.25 22.5,79.75 23.25,79 24.25,79 25.051,78.199 25.051,77.692 25.051,77.22 ; 25.5,81.25 25.5,80.25 26.75,79 29,79 30.051,77.949 30.051,77.22
  text "TEC+" at 28.762,139.187 h1.52 r90
  text "TEC-" at 31.302,139.187 h1.52 r90
  text "NTC1" at 31.837,134.449 h1.52
  text "GND" at 109.648,132.656 h1.52
  text "LED_IR(-)" at 115.642,132.656 h1.52
  text "NTK-4" at 68.002,130.748 h3
  text "NTC2" at 24.137,130.249 h1.52
  text "NTC1" at 31.837,130.249 h1.52
  text "GND" at 109.648,128.438 h1.52
  text "VDDA" at 115.642,128.438 h1.52
  text "aabal" at 68.502,126.248 h3
  text "VRef_Res" at 7.937,124.866 h1.52
  text "GND" at 109.648,124.221 h1.52
  text "VDDD" at 115.642,124.221 h1.52
  text "GND" at 7.937,122.199 h1.52
  text "FPGA" at 137.418,101.9 h1.52
  text "RS" at 127.418,94.739 h1.52
  text "CmAD2" at 122.847,92.199 h1.52
  text "CmAD3" at 122.847,89.659 h1.52
  text "CSBot" at 123.355,87.119 h1.52
  text "MCLK" at 124.371,84.579 h1.52
  text "CmAD0" at 122.847,82.039 h1.52
  text "CmAD1" at 123.355,79.499 h1.52
  text "CSTop" at 122.847,77.013 h1.52
  text "IN2" at 126.148,74.419 h1.52
  text "IN1" at 126.656,71.879 h1.52
  text "ADCCLK" at 121.324,69.339 h1.52
  text "CDSCLK1" at 120.308,66.799 h1.52
  text "CDSCLK2" at 119.8,64.259 h1.52
  text "SCLK" at 124.371,61.719 h1.52
  text "+6" at 22.892,59.423 h1.52
  text "GND" at 30.648,59.423 h1.52
  text "SLOAD" at 122.847,59.179 h1.52
  text "D7" at 127.418,56.639 h1.52
  text "+0,5" at 22.892,55.46 h1.52
  text "GND" at 30.648,55.206 h1.52
  text "D6" at 127.418,54.099 h1.52
  text "D5" at 127.418,51.559 h1.52
  text "GND" at 30.648,50.988 h1.52
  text "D4" at 127.418,49.019 h1.52
  text "D3" at 127.418,46.479 h1.52
  text "D2" at 127.418,43.939 h1.52
  text "D1" at 127.926,41.399 h1.52
  text "D0" at 127.418,38.859 h1.52
  text "SDATA" at 122.847,36.319 h1.52
  text "U_AOS" at 14.961,25.2 h1.52 r90
  text "VINR" at 66.8,23.8 h1.52 r90
  text "VING" at 66.8,8.4 h1.52 r90
  text "GND" at 51.922,6.03 h1.52 r90
  text "VINB" at 54.462,6.03 h1.52 r90
Bottom Overlay:
  drawing of 16 lines, arcs and shapes, not listed
Mechanical 1:
  the board outline again, w0.254

## Text inside footprints (layer, text, board x,y; h text height)
X2: Top Overlay "GND" at 42.489,54.75 h1.52; Top Overlay "GND" at 103.489,54.75 h1.52; Top Overlay "GND" at 103.489,100.5 h1.52; Top Overlay "GND" at 42.489,100.5 h1.52; Top Overlay "RS" at 100.926,87.923 h1.52; Top Overlay "Case" at 97.879,90.463 h1.52; Top Overlay "TEC-" at 97.879,85.383 h1.52; Top Overlay "CmAD2" at 96.356,82.843 h1.52; Top Overlay "CmAD3" at 96.356,80.303 h1.52; Top Overlay "CSBot" at 96.864,77.763 h1.52; Top Overlay "MCLK" at 97.879,75.223 h1.52; Top Overlay "VSSD" at 97.879,72.683 h1.52; Top Overlay "VDDD" at 97.879,70.143 h1.52; Top Overlay "BlackLevel" at 89.5,67.603 h1.52; Top Overlay "VclnRef" at 94.071,65.063 h1.52; Top Overlay "OutBot_p" at 92.293,62.756 h1.52; Top Overlay "OutBot_n" at 92.293,60.112 h1.52; Top Overlay "VCM" at 99.403,57.443 h1.52; Top Overlay "InGaAsPref" at 47,57.443 h1.52; Top Overlay "OutTop_p" at 47,59.991 h1.52; Top Overlay "OutTop_n" at 47,62.556 h1.52; Top Overlay "Guard" at 47,65.063 h1.52; Top Overlay "CDR_Ref" at 47,67.632 h1.52; Top Overlay "InGaAs_N" at 47,70.17 h1.52; Top Overlay "VDDA" at 47,72.683 h1.52; Top Overlay "VSSA" at 47,75.223 h1.52; Top Overlay "CSTop" at 47,77.767 h1.52; Top Overlay "CmAD1" at 47,80.303 h1.52; Top Overlay "CmAD0" at 47,82.843 h1.52; Top Overlay "TEC+" at 47,85.383 h1.52; Top Overlay "NTC1" at 47,90.463 h1.52; Top Overlay "NTC2" at 47,87.923 h1.52
X4: Top Overlay "Amper" at 10.373,136.715 h0.63 r270; Top Overlay "Voltage" at 10.373,132.515 h0.63 r270
X5: Top Overlay "Amper" at 10.373,42.504 h0.63 r270; Top Overlay "Voltage" at 10.373,38.304 h0.63 r270
X8: Bottom Overlay "OUT1" at 35.877,74.937 h1.52 r270; Bottom Overlay "OUT2" at 35.877,91.437 h1.52 r270; Bottom Overlay "OUT3" at 35.877,108.437 h1.52 r270; Bottom Overlay "OUT4" at 2.174,74.437 h1.52 r270; Bottom Overlay "OUT5" at 2.174,91.437 h1.52 r270; Bottom Overlay "OUT6" at 2.174,108.437 h1.52 r270; Bottom Overlay "IN" at 26.649,67.357 h1.52 r270
X9: Top Overlay "Amper" at 139.627,106.881 h0.63 r90; Top Overlay "Voltage" at 139.627,111.081 h0.63 r90